# Allegro board HAENYEO1.brd
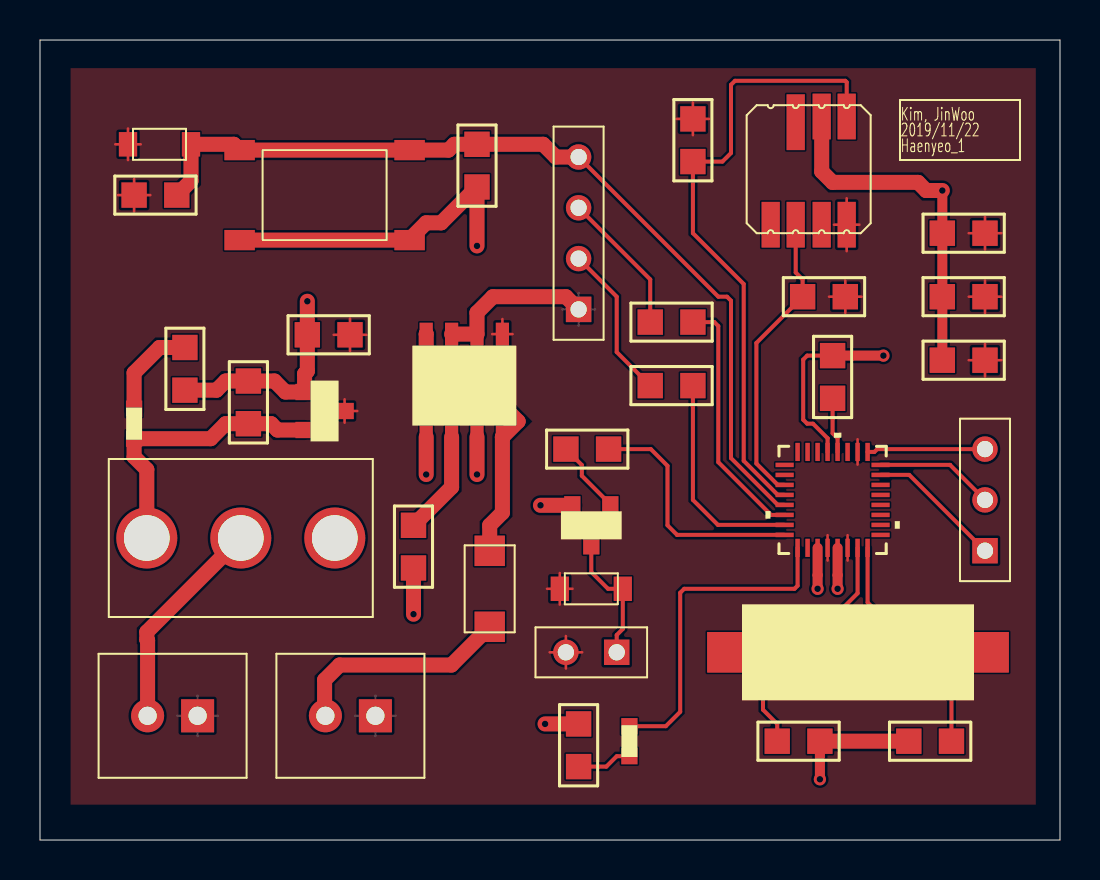
[diagram p0: board, top side]
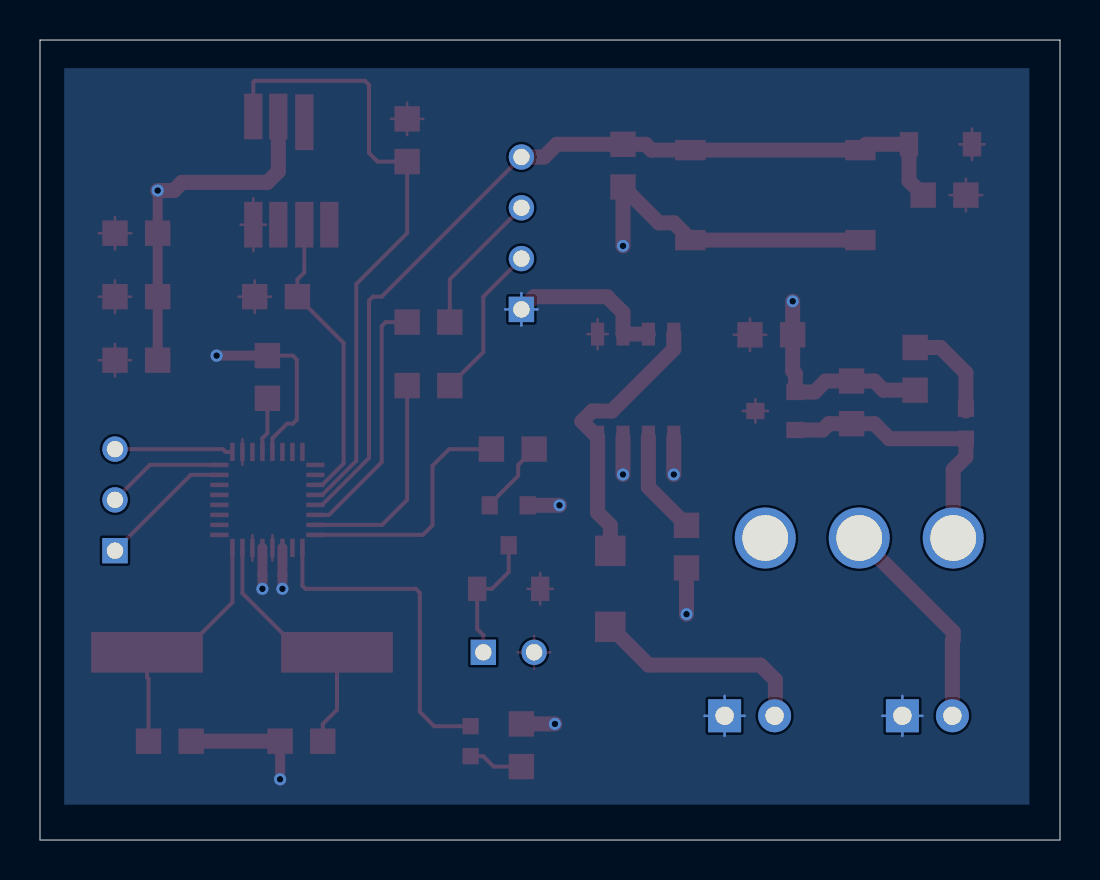
[diagram p1: board, bottom side, seen from below]

Outline 51 x 40 mm; copper layers: TOP, BOTTOM. Coordinates in mm from the lower left corner of the outline.
Outline path: 0,40 0,0 51,0 51,40 0,40

## Design rules (mm)
constraint set DEFAULT: min track width 0.127

## Placement (name value [footprint] x y rotation side)
C1  20p  [SMC0805]  39 4.94 180 top
C2  20p  [SMC0805]  43.44 4.94 0 top
C3  0.1u  [SMC0805]  21.85 34.79 270 top
C4  100nF  [SMC0805]  39.63 22.08 90 top
C5  1uF  [SMC0805]  47.25 23.99 180 top
C6  1uF  [SMC0805]  47.25 27.17 180 top
C7  4,7uF_16U  [SMC0805]  47.25 30.34 180 top
C8  1uF  [SMC0805]  10.42 20.81 90 top
C9  1uF  [SMC0805]  15.5 25.26 180 top
D1  MMSD4148  [SOD-123]  5.97 34.79 0 top
D2  LED  [0603LED]  29.47 4.94 90 top
D3  MMSD4148  [SOD-123]  27.56 12.56 0 top
D4  SS5819  [DO-214AC]  22.49 12.56 270 top
D5  LED  [0603LED]  4.71 20.81 270 top
IC1  328P-MUR  [32M1-A]  39.63 17 90 top
J1  BATTERY  [HEADER2_2P5MM]  7.88 6.21 270 top
J2  BOOTLOADER  [HEADER3_2P54MM]  47.25 14.46 180 top
J3  UART  [HEADER4_2P54MM]  26.93 26.53 180 top
J4  CHARGE  [HEADER2_2P5MM]  16.77 6.21 270 top
M1  PN-VM102  [HEADER2_2P54MM]  28.84 9.38 270 top
Q1  BCX19LT1G  [SOT-23]  27.56 15.74 180 top
R1  2.2k  [SMC0805]  32.65 36.06 270 top
R2  2.2k  [SMC0805]  40.26 27.17 180 top
R3  1k  [SMC0805]  4.71 32.25 0 top
R4  0.25K  [SMC0805]  26.93 3.67 90 top
R5  1k  [SMC0805]  32.65 22.72 180 top
R6  0.475k  [SMC0805]  26.29 19.55 0 top
R7  1k  [SMC0805]  32.65 25.89 180 top
R8  1k  [SMC0805]  18.68 15.74 270 top
R9  0.25K  [SMC0805]  7.25 24.62 270 top
SW1  RESET SW  [TS-1105SMD]  14.23 32.25 0 top
SW2  MST 103  [MST103]  5.34 15.1 90 top
U1  MS5803-14BA  [MS5803]  41.53 30.34 90 top
U2  MCP1700  [SOT-23]  14.23 21.45 270 top
U3  TP4056  [SOP8]  21.22 22.72 0 top
Y1  8MHz  [HC49SM40]  40.9 9.38 0 top

## Library data of the parts
C1-C6 C8 C9 = CAP NP
C7 = CAPACITOR POL
D1 D3 D4 = DIODE
D2 D5 = LED
IC1 = 328P-MUR
J1 J4 = CONN SOCKET 2
J2 = CONN SOCKET 3
J3 = CONN SOCKET 4
M1 = PN-VM102
Q1 = 1R1001
R1 R2 R6 = R
R3-R5 R7-R9 = RESISTOR
SW1 = SW_TC_SPST
SW2 = SW_T_SPDT
U1 = MS5803-14BA
U2 = MCP1700
U3 = TP4056
Y1 = CRYSTAL

## Footprints (pads in the part's own frame, mm; a bottom-side part is the same pattern mirrored in y, then rotated)
32M1-A
  rect 0.91x0.225 smd: 1(-2.398,1.75) 2(-2.398,1.25) 3(-2.398,0.75) 4(-2.398,0.25) 5(-2.398,-0.25) 6(-2.398,-0.75) 7(-2.398,-1.25) 8(-2.398,-1.75) 17(2.398,-1.75) 18(2.398,-1.25) 19(2.398,-0.75) 20(2.398,-0.25) 21(2.398,0.25) 22(2.398,0.75) 23(2.398,1.25) 24(2.398,1.75)
  rect 0.225x0.91 smd: 9(-1.75,-2.398) 10(-1.25,-2.398) 11(-0.75,-2.398) 12(-0.25,-2.398) 13(0.25,-2.398) 14(0.75,-2.398) 15(1.25,-2.398) 16(1.75,-2.398) 25(1.75,2.398) 26(1.25,2.398) 27(0.75,2.398) 28(0.25,2.398) 29(-0.25,2.398) 30(-0.75,2.398) 31(-1.25,2.398) 32(-1.75,2.398)
0603LED
  rect 0.813x0.813 smd: 1(-0.75,0) 2(0.75,0)
DO-214AC
  rect 1.524x1.524 smd: 1(-1.9,0) 2(1.9,0)
HC49SM40
  rect 5.588x2.032 smd: 1(-4.75,0) 2(4.75,0)
HEADER2_2P5MM
  rect 1.651x1.651 hole 0.914: 1(0,0)
  round 1.651 hole 0.914: 2(0,-2.5)
HEADER2_2P54MM
  rect 1.27x1.27 hole 0.813: 1(0,0)
  round 1.27 hole 0.813: 2(0,-2.54)
HEADER3_2P54MM
  rect 1.27x1.27 hole 0.813: 1(0,0)
  round 1.27 hole 0.813: 2(0,-2.54) 3(0,-5.08)
HEADER4_2P54MM
  rect 1.27x1.27 hole 0.813: 1(0,0)
  round 1.27 hole 0.813: 2(0,-2.54) 3(0,-5.08) 4(0,-7.62)
MS5803
  rect 2.286x0.914 smd: 1(5.835,1.2) 2(5.835,2.45) 5(0.425,1.2) 6(0.425,2.45) 7(0.425,3.75) 8(0.425,5)
  rect 2.794x0.914 smd: 3(5.55,3.75)
MST103
  round 3.048 hole 2.286: 1(0,0) 2(0,-4.7) 3(0,-9.4)
SMC0805
  rect 1.27x1.27 smd: 1(0,0) 2(2.134,0)
SOD-123
  rect 0.914x1.219 smd: 1(-1.575,0) 2(1.575,0)
SOP8
  rect 0.66x1.143 smd: 1(-1.905,-2.575) 2(-0.635,-2.575) 3(0.635,-2.575) 4(1.905,-2.575) 5(1.905,2.575) 6(0.635,2.575) 7(-0.635,2.575) 8(-1.905,2.575)
SOT-23
  rect 0.813x0.914 smd: 1(-0.95,-1) 2(0.95,-1) 3(0,1)
TS-1105SMD
  rect 1.524x1.016 smd: 1(-4.25,2.25) 2(4.25,2.25) 3(-4.25,-2.25) 4(4.25,-2.25)

## Nets
3V3: C5.1 C6.1 C7.1 C9.1 D1.1(K) D3.1(K) IC1.4 IC1.6(VCC2) IC1.18 M1.2 R1.1 R2.1 R3.1 U1.5(VDD) U2.3(OUT) U3.5
GND: C1.1 C2.1 C3.2 C4.2 C5.2 C6.2 C7.2 C8.2 C9.2 IC1.3 IC1.5 IC1.21 J1.1 J3.1 J4.1 Q1.2 R4.2 R8.2 R9.2 SW1.3 SW1.4 U1.2 U2.1 U3.1 U3.3 U3.6 U3.7
VIN: C8.1 D5.2 SW2.1 U2.2
AREF: C4.1 IC1.20
CHARGE: D4.2 J4.2
D0/RX: IC1.30 R7.1
D1/TX: IC1.31 R5.1
D2: IC1.32 R6.2
D3: D2.2 IC1.1
MISO: IC1.16 J2.2
MOSI: IC1.15 J2.1
RESET: C3.1 D1.2 IC1.29 J3.4 R3.2 SW1.1 SW1.2
RX: J3.3 R7.2
SCK: IC1.17 J2.3
SCL: IC1.28 R1.2 U1.1
SDA: IC1.27 R2.2 U1.7
TX: J3.2 R5.2
N04586: C2.2 IC1.8 Y1.2
N04598: C1.2 IC1.7 Y1.1
N13482: D3.2 M1.1(VDD) Q1.3(E)
N18962: D2.1(CATHODE) R4.1
N24660: R8.1 U3.2
N25035: D4.1(K) U3.4(VCC) U3.8
N33222: J1.2 SW2.2
N44649: D5.1(CATHODE) R9.1
N44789: Q1.1 R6.1

Pads without a net: IC1 2 9 10 11 12 13 14 19 22 23 24 25 26; SW2 3; U1 3 6 8

## Via types
v1: diameter 0.61, hole 0.33, TOP to BOTTOM, 12 vias

## Routing (per net, layer and track width the routed paths; a pad name or vN(x,y) marks a point on that pad's centre or on a via; arc(x,y) is an arc through that point)
3V3: length 44.4
  TOP w0.127: R3.1 4.71,33.06 ; R3.1 5.52,32.25 ; R3.1 4.71,31.43 ; R3.1 3.89,32.25 ; 39.45,27.17 R2.1 ; R2.1 41.08,27.17 ; R2.1 40.26,26.35 ; R2.1 40.26,27.98 ; C5.1 47.25,24.8 ; C5.1 47.25,23.18 ; C5.1 48.06,23.99 ; C5.1 46.44,23.99 ; U3.5 23.12,26.04 ; U3.5 23.63,25.3 ; U3.5 23.12,24.55 ; U3.5 22.61,25.3 ; 31.83,36.06 R1.1 ; R1.1 33.46,36.06 ; R1.1 32.65,35.24 ; R1.1 32.65,36.87 ; 40.38,15.24 IC1.6 40.38,13.97 ; 39.7,30.76 U1.5 ; U1.5 40.34,29.44 ; U1.5 40.34,32.09 ; U1.5 40.97,30.76 ; C9.1 15.5,26.07 ; C9.1 14.69,25.26 ; C9.1 15.5,24.45 ; C9.1 16.31,25.26 ; C7.1 48.06,30.34 ; C7.1 46.44,30.34 ; C7.1 47.25,29.53 ; C7.1 47.25,31.15 ; M1.2 26.29,10.2 ; M1.2 25.48,9.38 ; M1.2 27.11,9.38 ; M1.2 26.29,8.57 ; D3.1 26.63,12.56 ; D3.1 25.99,13.35 ; D3.1 25.35,12.56 ; D3.1 25.99,11.77 ; 15.23,20.87 U2.3 ; U2.3 15.23,22.03 ; U2.3 15.87,21.45 ; U2.3 14.59,21.45 ; C6.1 47.25,27.98 ; C6.1 48.06,27.17 ; C6.1 47.25,26.35 ; C6.1 46.44,27.17 ; 3.76,34.79 D1.1 ; D1.1 4.4,35.57 ; D1.1 5.04,34.79 ; D1.1 4.4,34 ; 39.38,13.97 IC1.4 39.38,15.24 ; 40.88,20.04 IC1.18 40.88,18.77
GND: length 93
  TOP w0.2: C4.2 38.36,24.22 38.16,24.02 38.16,21.01 38.36,20.81 38.65,20.81 39.38,20.08 IC1.21
  TOP w0.5: v1(39.88,12.56) 39.88,13.24 IC1.5 ; v1(45.12,32.47) C7.2 C6.2 C5.2 ; v1(42.17,24.22) C4.2 ; v1(38.88,12.56) 38.88,13.24 IC1.3 ; C1.1 v1(39,3.04)
  TOP w0.75: R8.2 v1(18.68,11.29) ; Q1.2 v1(25.03,16.74) ; v1(45.12,32.47) 44.31,32.47 43.9,32.88 39.63,32.88 39.09,33.43 39.09,36.18 ; J3.1 26.29,27.17 22.65,27.17 21.85,26.37 U3.6 U3.7 ; v1(13.37,26.94) C9.2 13.37,23.44 13.23,23.31 U2.1 12.27,22.4 11.72,22.95 C8.2 9.28,22.95 8.83,22.49 R9.2 ; SW1.3 SW1.4 18.48,30.03 19.31,30.86 20.06,30.86 C3.2 v1(21.85,29.7) ; R4.2 v1(25.25,5.8) ; v1(21.85,18.27) 21.85,20.14 ; v1(19.31,18.27) 19.31,20.14 ; C2.1 C1.1
  BOTTOM w0.127: 6.88,6.21 J1.1 ; J1.1 8.88,6.21 ; J1.1 7.88,5.21 ; J1.1 7.88,7.21 ; J3.1 26.93,27.34 ; J3.1 26.12,26.53 ; J3.1 27.74,26.53 ; J3.1 26.93,25.72 ; 15.77,6.21 J4.1 ; J4.1 17.77,6.21 ; J4.1 16.77,7.21 ; J4.1 16.77,5.21
VIN: length 14.2
  TOP w0.75: SW2.1 5.34,18.52 4.71,19.16 D5.2 8.53,20.06 9.28,20.81 C8.1 11.56,20.81 11.87,20.5 U2.2
AREF: length 2.8
  TOP w0.2: IC1.20 39.88,20.08 39.63,20.33 C4.1
CHARGE: length 11.2
  TOP w0.75: D4.2 20.57,8.75 14.98,8.75 14.23,8 14.23,6.25 J4.2
D0/RX: length 12.6
  TOP w0.2: IC1.30 37.23,16.25 36.55,16.25 33.91,18.89 33.91,25.69 33.72,25.89 R7.1
D1/TX: length 10.8
  TOP w0.2: R5.1 32.65,17 33.9,15.75 IC1.31
D2: length 12.3
  TOP w0.2: IC1.32 31.85,15.25 ; 31.85,15.25 31.86,15.25 ; 31.85,15.25 31.38,15.74 31.38,18.71 30.54,19.55 R6.2
D3: length 16.7
  TOP w0.2: D2.2 31.29,5.69 32.01,6.41 32.01,12.36 32.21,12.56 37.72,12.56 37.88,12.71 IC1.1
MISO: length 5.9
  TOP w0.2: IC1.16 45.5,18.75 J2.2
MOSI: length 6.8
  TOP w0.2: IC1.15 43.46,18.25 J2.1
RESET: length 44.8
  TOP w0.2: IC1.29 36.89,16.75 34.55,19.09 34.55,26.96 34.35,27.17 33.91,27.17 J3.4
  TOP w0.75: R3.2 7.55,32.96 D1.2 9.69,34.79 SW1.1 ; SW1.1 9.98,34.49 ; SW1.1 SW1.2 20.42,34.5 20.71,34.79 C3.1 25.16,34.79 25.79,34.15 J3.4
RX: length 7.2
  TOP w0.2: J3.3 30.51,28.03 R7.2
SCK: length 5.9
  TOP w0.2: J2.3 41.86,19.55 41.72,19.4 IC1.17
SCL: length 31.9
  TOP w0.2: 40.34,36.18 40.34,37.89 40.26,37.96 34.75,37.96 34.55,37.76 34.55,34.35 34.12,33.92 R1.2 32.65,30.34 35.19,27.8 35.19,18.96 36.89,17.25 IC1.28
SDA: length 14.9
  TOP w0.2: IC1.27 36.89,17.75 35.82,18.82 35.82,24.85 R2.2 38.13,28.03 37.78,28.37 U1.7
TX: length 7.8
  TOP w0.2: R5.2 28.84,24.4 28.84,27.17 J3.2
N04586: length 12.5
  TOP w0.2: IC1.8 41.38,11.88 43.87,9.38 Y1.2 45.65,8.14 45.57,8.07 C2.2
N04598: length 13
  TOP w0.2: IC1.7 40.88,12.34 37.93,9.38 Y1.1 36.15,6.51 36.86,5.8 C1.2
N13482: length 6.6
  TOP w0.2: Q1.3 27.56,13.39 28.4,12.56 D3.2 29.14,10.55 28.84,10.25 M1.1
N18962: length 2.8
  TOP w0.2: D2.1 28.84,4.19 28.32,3.67 R4.1
N24660: length 5.2
  TOP w0.75: 20.58,20.14 20.58,17.64 R8.1
N25035: length 13.9
  TOP w0.75: D4.1 22.49,15.74 23.12,16.37 23.12,20.14 23.91,20.93 23.39,21.45 22.41,21.45 19.31,24.55 U3.8
N33222: length 10.9
  TOP w0.75: J1.2 5.38,9.98 5.34,10.02 5.34,10.4 SW2.2
N44649: length 5
  TOP w0.75: R9.1 5.97,24.62 4.71,23.36 D5.1 4.71,21.45
N44789: length 3.7
  TOP w0.2: R6.1 27.09,18.75 27.09,18.21 28.51,16.79 Q1.1

## Copper pours and planes (outline as drawn; the poured copper is in the pictures)
3V3 on TOP: 1.53,1.76 1.53,38.6 49.79,38.6 49.79,1.76
GND on BOTTOM: 1.53,38.6 1.53,1.76 49.79,1.76 49.79,38.6

## Text on the board
Ref Des/Silkscreen Top: Kim, JinWoo | 2019/11/22 | Haenyeo_1
NCLEGEND-1-2: FIGURE | FINISHED_SIZE | 0.3302 | 0.8128 | 0.9144 | 2.286 | DRILL CHART: TOP to BOTTOM | ALL UNITS ARE IN MILLIMETERS | PLATED | QTY | 12 | 9 | 4 | 3
